# EAGLE board TSAL_2016_Manual_Route (EAGLE 7.5.0)
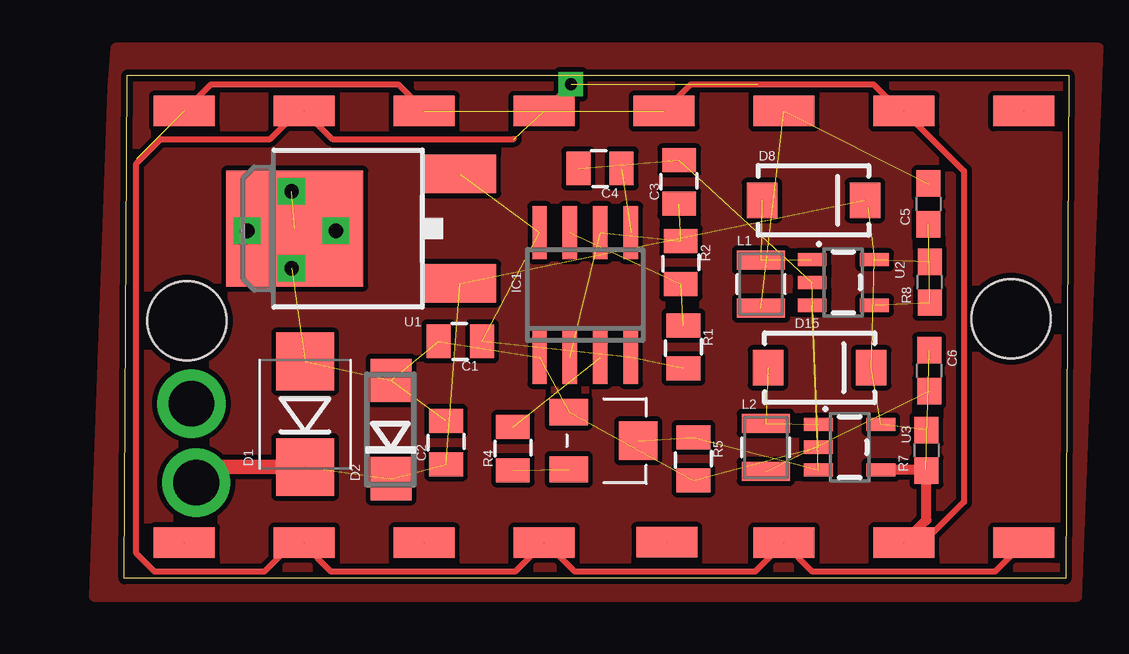
[diagram p0: board, top side]
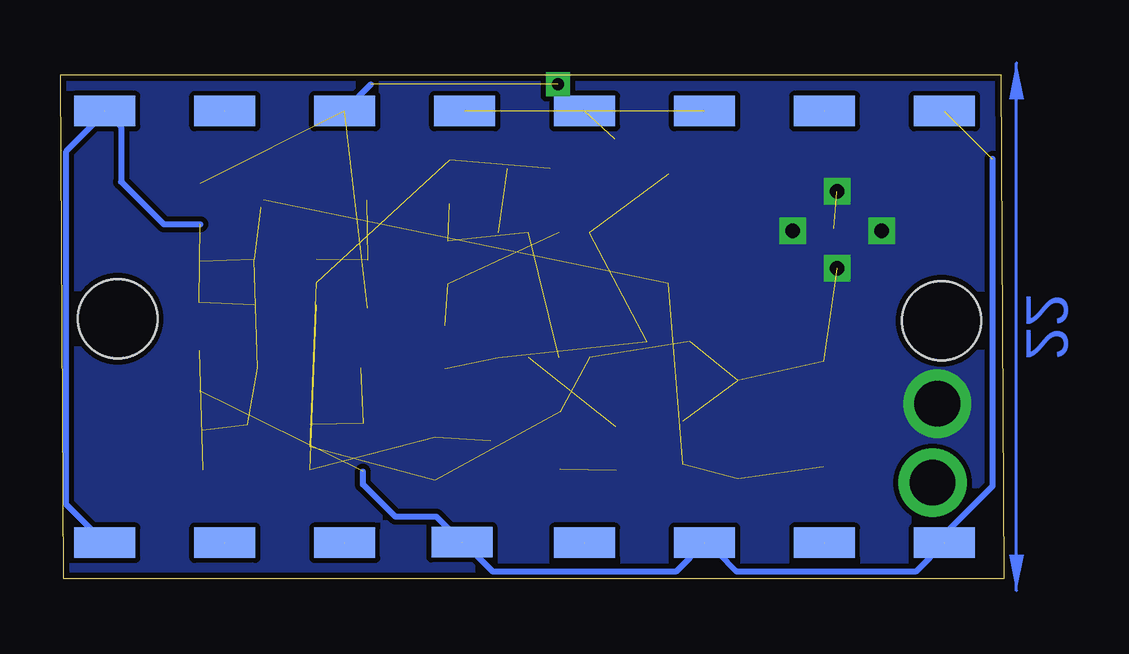
[diagram p1: board, bottom side, seen from below]

Size 39.37 x 20.98 mm. Coordinates in mm from the lower left corner, seen from the top.
Outline: 0,0 0.13,20.98 39.37,20.98 39.25,0 0,0
Copper layers (1*16): Top 0.035mm / dielectric 1.5mm / Bottom 0.035mm
Design rules "SparkFun": minimum track width 8mil, minimum drill 20mil, track to track 8mil, track to pad 8mil, pad to pad 8mil, via to via 8mil, smd to smd 8mil, copper to edge 10mil, drill to drill 8mil, minimum pad ring 12mil, minimum via ring 10mil, stop-mask expansion 4mil, vias tented up to drill 25mil, thermal gap 10mil
Holes 3.3 mm at 2.62,10.74 36.97,10.83

## Footprints (pad centres in the part's own frame; a part is rotated, then mirrored left to right if it is on the bottom)
0805@1 = smd 1 x 1.4: 1 -0.9,0; 2 0.9,0
0603@1 = smd 1.1 x 1: 1 -0.85,0; 2 0.85,0
SMB-DIODE = smd 2.4 x 2.4: A 2.2,0; C -2.2,0
DO-214AC = smd 1.8 x 1.7: A 2.05,0; C -2.05,0
LED_TSAL = smd 2.54 x 1.27: A 0,0 | smd 2.54 x 1.27 bottom: B 0,0
SMA-DIODE = smd 1.27 x 1.47: A -2.15,0; C 2.15,0
SO08 = smd 0.6 x 2.2: 1 -1.905,-2.6; 2 -0.635,-2.6; 3 0.635,-2.6; 4 1.905,-2.6; 5 1.905,2.6; 6 0.635,2.6; 7 -0.635,2.6; 8 -1.905,2.6
1007 = smd 2 x 0.8: 1 0,1; 2 0,-1
22AR100KLFTR = smd 1.092 x 1.6: 1 1.194,-1.448; 3 -1.194,-1.448 | smd 1.6 x 1.6: 2 0,1.448
DPAK = smd 1.6 x 3: 1 -2.28,-4.04; 3 2.28,-4.04 | smd 4.826 x 5.715: 2 0,2.858
SOT23-5 = smd 0.55 x 1.2: 1 -0.95,-1.3; 2 0,-1.3; 3 0.95,-1.3; 4 0.95,1.3; 5 -0.95,1.3

## Placement (x,y rotation side)
C1  1uF  [0805@1]  14.01,9.89 180 top
C2  1uF  [0805@1]  13.41,5.66 90 top
C3  22uF  [0805@1]  23.13,16.54 90 top
C4  1uF  [0805@1]  19.84,17.1 180 top
C5  2.2 uF  [0603@1]  33.52,15.62 90 top
C6  2.2uF  [0603@1]  33.55,8.66 270 top
D1  DIODE-ZENERSMB  [SMB-DIODE]  7.54,6.85 90 top
D2  TVS  [DO-214AC]  11.12,6.21 90 top
D3  LED_TSALLED  [LED_TSAL]  27.5,19.49 0 top
D4  LED_TSALLED  [LED_TSAL]  17.5,19.49 0 bottom
D5  LED_TSALLED  [LED_TSAL]  7.5,19.49 0 bottom
D6  LED_TSALLED  [LED_TSAL]  7.5,1.49 0 bottom
D7  LED_TSALLED  [LED_TSAL]  17.5,1.49 0 bottom
D8  B340A  [SMA-DIODE]  28.73,15.77 0 top
D9  LED_TSALLED  [LED_TSAL]  27.5,1.49 0 bottom
D10  LED_TSALLED  [LED_TSAL]  37.5,1.49 0 bottom
D11  LED_TSALLED  [LED_TSAL]  37.5,19.49 0 bottom
D12  LED_TSALLED  [LED_TSAL]  22.62,1.51 0 top
D13  LED_TSALLED  [LED_TSAL]  12.5,1.49 0 top
D14  LED_TSALLED  [LED_TSAL]  2.5,1.49 0 top
D15  B340A  [SMA-DIODE]  28.99,8.79 0 top
D16  LED_TSALLED  [LED_TSAL]  2.5,19.49 0 top
D17  LED_TSALLED  [LED_TSAL]  12.5,19.49 0 top
D18  LED_TSALLED  [LED_TSAL]  22.5,19.49 0 top
D19  LED_TSALLED  [LED_TSAL]  32.5,19.49 0 top
D20  LED_TSALLED  [LED_TSAL]  32.5,1.49 0 top
IC1  LM555D  [SO08]  19.21,11.82 0 top
L1  33uH  [1007]  26.54,12.28 0 top
L2  33uH  [1007]  26.74,5.46 0 top
POT1  22AR100KLFTR  [22AR100KLFTR]  19.98,5.74 270 top
R1  2k  [0805@1]  23.31,9.66 270 top
R2  10k  [0805@1]  23.2,13.18 270 top
R4  10k  [0805@1]  16.2,5.41 90 top
R5  10k  [0805@1]  23.73,4.99 270 top
R7  499  [0603@1]  33.45,5.34 90 top
R8  499  [0603@1]  33.58,12.36 90 top
U1  NCV7805BDTRKG  [DPAK]  9.96,14.59 90 top
U2  AL8805WS  [SOT23-5]  29.98,12.34 270 top
U3  AL8805WS  [SOT23-5]  30.24,5.48 270 top

## Library data of the parts
C1 C2 C4 = FSAE Electric; PARTNO: UMK212F105ZG-T
C3 = FSAE Electric; PARTNO: CL21A226MQCLQNC
C5 C6 = FSAE Electric; PARTNO: EMK107F225ZA-T
D1-D7 D9-D14 D16-D20 IC1 = FSAE Electric
D8 D15 = FSAE Electric; PROD_ID: DIO-09886
L1 L2 = FSAE Electric; PARTNO: CB2518T330K
POT1 = FSAE Electric; PARTNO: 22AR100KLFTR
R1 = FSAE Electric; PARTNO: RC0805FR-072KL
R2 R4 R5 = FSAE Electric; PARTNO: RC0805FR-0710KL
R7 R8 = FSAE Electric; PARTNO: RC0603FR-07499RL
U1 = FSAE Electric; PARTNO: NCV7805BDTRKG
U2 U3 = FSAE Electric; PROD_ID: IC-11626

## Nets
+5V: C1.1 IC1.4 IC1.8 R1.2 U1.3
+24V: C2.1 D1.C D2.C D8.C D15.C R7.2 R8.2 U1.1 U2.5 U3.5
GND: C1.2 C2.2 C3.2 C4.2 D1.A D2.A IC1.1 POT1.3 R5.2 U1.2 U2.2 U3.2
N$1: C6.1 D20.A R7.1 U3.4
N$2: POT1.2 R5.1 U2.3 U3.3
N$3: D17.A D18.B
N$4: C4.1 IC1.5
N$5: IC1.7 R1.1 R2.2
N$7: D15.A L2.1 U3.1
N$8: C5.1 D11.A R8.1 U2.4
N$9: D10.A D11.B
N$10: C3.1 IC1.2 IC1.6 R2.1
N$11: D18.A D19.B
N$12: D9.A D10.B
N$13: D7.A D9.B
N$14: C6.2 D12.B L2.2
N$15: D6.A D7.B
N$16: D5.A D6.B
N$17: D19.A D20.B
N$18: D12.A D13.B
N$19: C5.2 D3.B L1.2
N$20: D13.A D14.B
N$21: D16.A D17.B
N$22: D14.A D16.B
N$23: D4.A D5.B
N$24: D3.A D4.B
N$26: D8.A L1.1 U2.1
N$27: POT1.1 R4.1
N$28: IC1.3 R4.2

## Tracks (layer width: path | path; a pad name or v marks a point on that pad's centre or on a via)
+5V  (4 unrouted)
+24V  (via drill 1.9)  (9 unrouted)
  Top 0.406: D8.C 31,15.77 31,15.49
  Top 0.61: v3,3.99 3.65,4.65 D1.C
GND  (via drill 0.6, 1.9)  (12 unrouted)
  other vias: 2.8,7.29 5.13,14.49 6.98,16.14 8.83,14.49 6.98,12.94
  pour Bottom: -0.5,21.87 -0.5,-1.02 40.5,-1.02 40.5,21.87
  pour Bottom: -0.63,22.13 -0.5,-1.02 40.5,-1.02 40.37,22.13
N$1  (1 unrouted)
  Top 0.406: D20.A 33.45,2.44 R7.1 33.41,4.53 U3.4
N$2  (3 unrouted)
N$3  (1 unrouted)
N$4  (1 unrouted)
N$5  (2 unrouted)
N$7  (2 unrouted)
N$8  (3 unrouted)
  Bottom 0.254: D11.A 36.82,18.81 36.82,16.54 35.05,14.77 C5.1
N$9  (1 unrouted)
  Bottom 0.254: D10.A 39.11,3.1 39.11,17.81 37.5,19.42 D11.B
N$10  (3 unrouted)
N$11  (1 unrouted)
  Top 0.254: D18.A 23.61,20.61 31.23,20.61 32.35,19.49 D19.B
N$12  (1 unrouted)
  Top 0.254: D10.B 36.29,0.29 28.69,0.29 27.5,1.48 D9.A
N$13  (1 unrouted)
  Top 0.254: D9.B 26.29,0.29 18.79,0.29 17.58,1.49 D7.A
N$14  (2 unrouted)
  Bottom 0.254: D12.B 23.68,2.57 25.39,2.57 26.74,3.92 L2.2
N$15  (1 unrouted)
  Top 0.254: D7.B 16.29,0.29 8.63,0.29 7.5,1.41 D6.A
N$16  (1 unrouted)
  Top 0.254: D6.B 7.44,1.56 7.36,1.56 7.36,1.81 5.83,0.29 1.26,0.29 0.5,1.05 0.5,17.3 1.52,18.32 6.09,18.32 7.26,19.49 D5.A
N$17  (1 unrouted)
  Top 0.254: D19.A 35,16.99 35,3.19 33.3,1.49 D20.B
N$18  (1 unrouted)
  Bottom 0.254: D13.B 13.71,0.29 21.33,0.29 22.55,1.51 D12.A
N$19  (2 unrouted)
N$20  (1 unrouted)
  Top 0.254: 12.5,1.11 D13.A
  Bottom 0.254: D14.B 3.71,0.29 11.17,0.29 11.93,1.05 11.93,1.3 12.12,1.49 D13.A
N$21  (1 unrouted)
  Top 0.254: D16.A 3.61,20.61 11.42,20.61 12.5,19.53 D17.B
N$22  (2 unrouted)
  Bottom 0.254: 0.5,17.49 0.5,3.84 2.5,1.84 D14.A
N$23  (1 unrouted)
  Top 0.254: D5.B 8.67,18.32 16.25,18.32
N$24  (via drill 0.5)  (2 unrouted)
  Top 0.254: D4.B v18.61,20.61
  Bottom 0.254: 26.41,20.61 27.5,19.51 D3.A
N$26  (2 unrouted)
N$27  (1 unrouted)
N$28  (1 unrouted)
N$32
  pour Top: -0.5,20.49 -1.26,-0.76 39.74,-0.76 40.63,22.13 -0.37,22.13
(copper drawn outside any net)
  shapes: Bottom area x1